# Altium PCB key.PcbDoc
Units mm, origin at the board's own origin, x right, y up, seen from the top; angles counter-clockwise.
Board outline 151 x 86.38 mm, 2 copper layers (Top Layer, Bottom Layer); 15 components, 19 nets, 58 pads, 0 vias.
Unrouted connection lines stored in the file: 24.
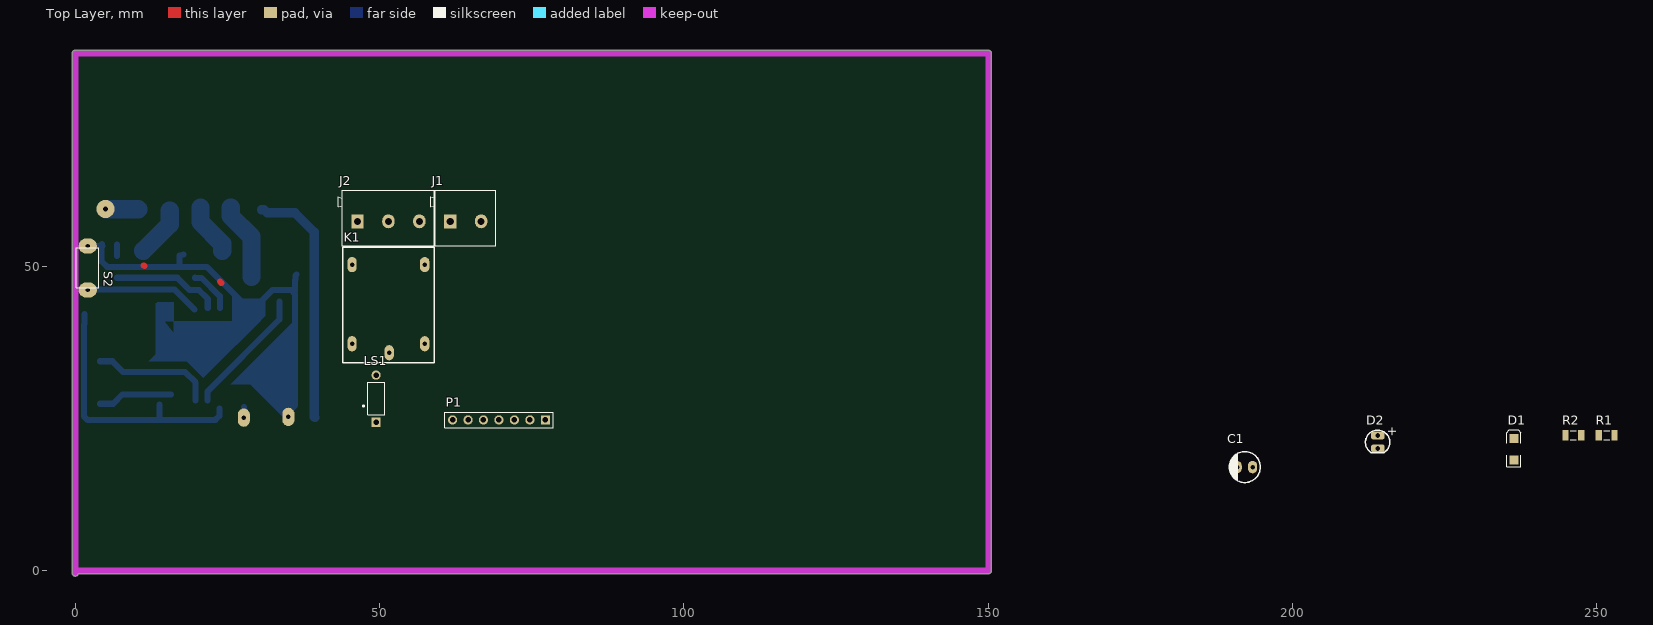
[diagram p0: Top Layer view]
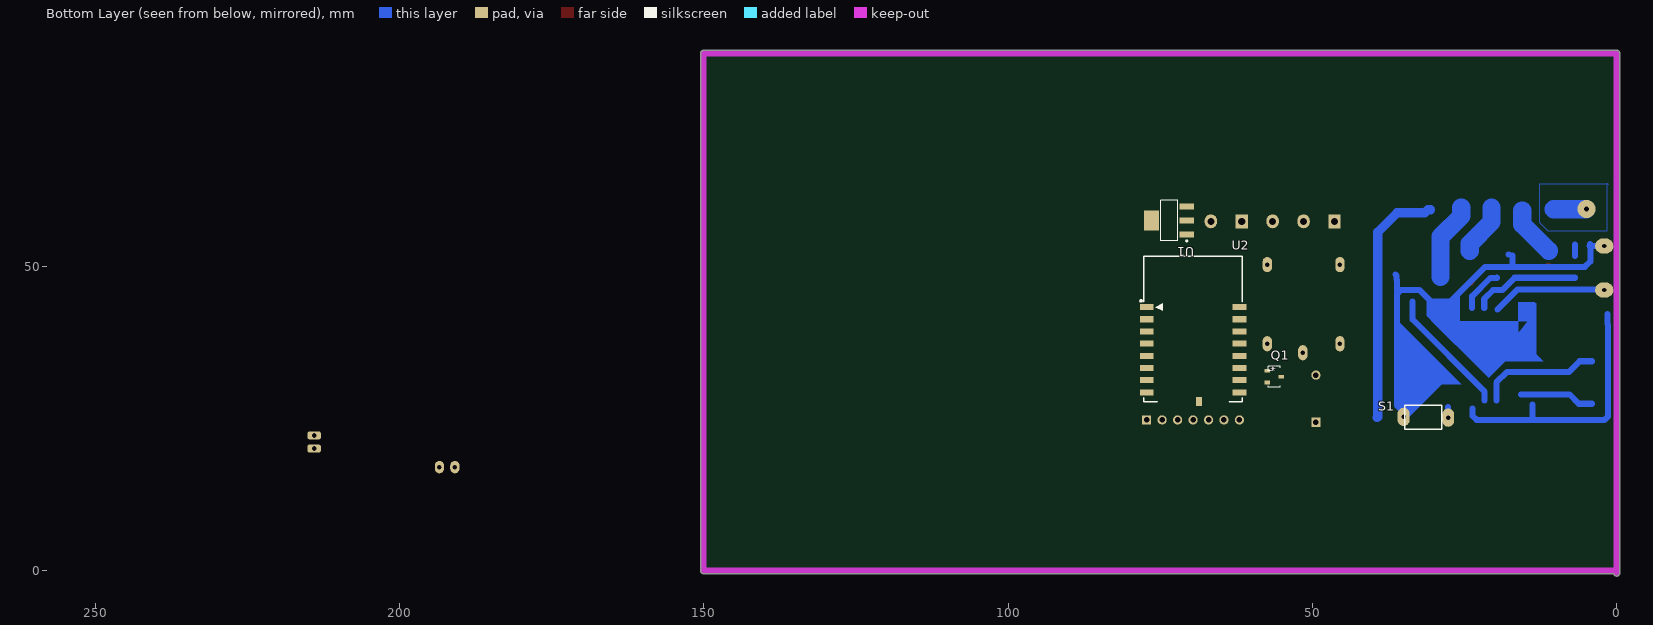
[diagram p1: Bottom Layer view, seen from below]

## Layer stack, top to bottom
Top Solder: solder mask 0.0102, Solder Resist, Dk 3.5
Top Layer: signal copper 0.0356
Dielectric 1: dielectric 0.32, FR-4, Dk 4.8
Bottom Layer: signal copper 0.0356
Bottom Solder: solder mask 0.0102, Solder Resist, Dk 3.5

## Board outline
-0.5,-0.381 -0.5,85 cw(c0,85) 0,85.5 150,85.5 cw(c150,85) 150.5,85 150.5,0 cw(c150,0) 150,-0.5 0.486,-0.5 cw(c0,-0.381)

## Design rules (kind name [scope] priority, off if disabled: settings)
Clearance Clearance_1 [InPolygon] p1: gap=0.8 ignorepadtopadclearanceinfootprint=FALSE
Clearance [All] p2: gap=0.254 ignorepadtopadclearanceinfootprint=FALSE except(0: Arc-Hole Track-Hole SMDPad-Hole THPad-Hole Via-Hole Fill-Hole Poly-Hole Region-Hole Text-Hole)
PolygonConnect [All] p1: connectstyle=Relief reliefconductorwidth=0.254 reliefentries=4 polygonreliefangle="90 Angle" airgapwidth=0.254
RoomDefinition tsc [InComponentClass('tsc')] p1: confinementstyle=ConfineIn formatcopy=TRUE lockcomponents=FALSE outline 144.907,-4.953 247.904,-4.953 247.904,23.114 144.907,23.114
RoutingLayers [All] p1: top layer_v5=FALSE bottom layer_v5=TRUE
RoutingVias [All] p1: holewidth=0.711 width=2.5 viastyle="Through Hole" minholewidth=0.711 minwidth=1.27 maxholewidth=0.711 maxwidth=2
SolderMaskExpansion [All] p1: expansion=0.102 istentingtop=FALSE
Width [All] p1: maxlimit=3 minlimit=0.5 preferedwidth=1
29 further rules are at their usual default settings.

## Components (designator, comment, footprint, x,y, rotation, side; value= is the part's Value field where it differs from the comment)
C1 "=Value" ELEC-CAP-RAD10-20 192.151,17.018 r0 top
D1 "D Tunnel1" 3.2X1.6X1.1 236.347,19.939 r90 top
D2 "LED 3mm" LED-3mm 213.868,21.209 r0 top
J1 "TBlock-2" "KF300-2 PIN" 61.595,57.404 r90 top
J2 "TBlock-3" "KF300-3 PIN" 46.355,57.404 r90 top
K1 "Relay-12vDC" Relays 43.942,34.163 r0 top
LS1 "Speaker" PIN2 49.403,27.051 r90 top
P1 "Header 7" HDR1X7 77.216,24.765 r180 top
Q1 "MMBT3904-TP" SOT23-3 56.268,33.147 r270 bottom
R1 "10K" "RES 1206 (3216X08L)" 251.587,22.225 r0 top
R2 "10K" "RES 1206 (3216X08L)" 246.126,22.225 r0 top
S1 "PB-2pin" PB-2pin 34.798,22.098 r180 bottom
S2 "PUSH BUTTON DOUBLE" "PUSH BUTTON" -0.254,49.784 r180 top
U1 "LM1117MP-3.3" MP04A_N 73.533,57.531 r0 bottom
U2 "ESP_12_E" ESP_12_E 77.591,43.306 r180 bottom

## Footprints (in the part's own frame and the unit in brackets; to place one, negate y for a bottom-side part, rotate by r counter-clockwise, add the part's x,y. Pads: shape width x height; smd on the part's side, far side on the other; paste and mask are expansions set on the pad)
3.2X1.6X1.1 [mm] "SMT LED; 2 Flat Leads"
  rect 1.5x1.5 smd: 1(-1.75,0) 2(1.75,0)
  silkscreen extent -2.9,-1.15 3.2,1.15
ELEC-CAP-RAD10-20 [mil]
  oval 60x80 hole 30: 1(-50,0) 2(50,0)
  silkscreen extent -100,-100 100,100, body extent -124,-124 124,124, height 404
ESP_12_E [mm] "ESP-12 Wi-Fi Module by AI-Thinker"
  rect 2.25x1 smd: 1(0.375,0) 2(0.375,-2) 3(0.375,-4) 4(0.375,-6) 5(0.375,-8) 6(0.375,-10) 7(0.375,-12) 8(0.375,-14) 15(15.625,-14) 16(15.625,-12) 17(15.625,-10) 18(15.625,-8) 19(15.625,-6) 20(15.625,-4) 21(15.625,-2) 22(15.625,0)
  rect 1x1.5 smd: 12(9,-15.5)
  silkscreen extent -0.7,-15.57 16.08,8.37, body extent 0,-15.49 16,8.51, height 2.75
HDR1X7 [mm] "Connector; Header; 7 Position"
  rect 1.5x1.5 hole 0.9: 1(0,0)
  round 1.5 hole 0.9: 2(2.54,0) 3(5.08,0) 4(7.62,0) 5(10.16,0) 6(12.7,0) 7(15.24,0)
  silkscreen extent -1.27,-1.27 16.51,1.27
"KF300-2 PIN" [mil]
  rect 90x80 hole 46: 1(0,0)
  oval 90x80 hole 46: 2(0,-200)
  silkscreen extent -160,-295 200,125, body extent -157,-295 200,127, height 493
"KF300-3 PIN" [mil]
  rect 90x80 hole 46: 1(0,0)
  oval 90x80 hole 46: 2(0,-200) 3(0,-400)
  silkscreen extent -160,-495 200,125, body extent -157,-495 200,128, height 503
LED-3mm [mm] "LED; 2 Leads"
  rrect50% 2.2x1.3 hole 0.8: 1(0.127,1.016) 2(0.127,-1.143)
  silkscreen extent -1.9,-1.81 2.09,1.89
MP04A_N [mm] "SOT223, 4-Leads, Body 6.5x3.5mm, Pitch 2.3mm, Lead Span 7mm, IPC Medium Density"
  rect 2.4x1 smd: 1(-2.9,2.3) 2(-2.9,0) 3(-2.9,-2.3)
  rect 2.4x3.3 smd: 4(2.9,0)
  silkscreen extent -3.02,-3.35 1.4,3.47, body extent -1.85,-3.35 1.85,3.35, height 1.8
PB-2pin [mm] "Switch"
  oval 2x3 hole 0.7: 1(-0.202,3.175) 2(7.112,3.048)
  silkscreen extent 0,1.14 6.1,5.08
PIN2 [mm] "Photosensitive Diode; 2 Leads"
  rect 1.5x1.5 hole 0.9: 1(-2.667,0)
  round 1.5 hole 0.9: 2(5.08,0)
  silkscreen extent -1.4,-1.4 3.94,2.17
"PUSH BUTTON" [mm]
  oval 3x2.5 hole 0.7: 2(-2.286,3.683) 4(-2.286,-3.556)
  silkscreen extent -4.06,-3.3 -0.38,3.3, body extent -3.93,-3.08 3.99,3.12, height 5.21
Relays [mil]
  oval 60x98.43 hole 30: 1(300,65) 2(60,635) 3(530,635) 4(60,123.11) 5(530,123.11)
  silkscreen extent 0,0 591,748
"RES 1206 (3216X08L)" [mm] "Chip Resistor, 2-Leads, Body 3.2x1.6mm, IPC High Density _ (0.125 W)"
  rect 1.05x1.7 smd: 1(-1.295,0) 2(1.301,0)
  silkscreen extent -0.5,-0.75 0.5,0.75, body extent -1.52,-0.76 1.53,0.76, height 0.6
SOT23-3 [mm]
  rect 0.6x0.9 smd: 1(0.32,-1.15) 2(2.22,-1.15) 3(1.27,1.15)
  silkscreen extent -0.48,-1 3.02,1

## Part data
C1: library part "Capacitor Electrolytic", "Electrolytic Capacitor"
D1: "Tunnel Diode - RLC Model", LatestRevisionDate=17-Jul-2002, LatestRevisionNote="Re-released for DXP Platform.", PackageDescription="SM LED; 2 Flat Leads", PackageReference=3.2X1.6X1.1, PackageVersion=Feb-2002, Published=8-Jun-2000, Publisher="Altium Limited"
D2: "Typical LED", Designer="Seyed Mohsen Ghasemian", PackageDescription="LED; 2 Leads", PackageReference=LED, Published=02/04/2012, Publisher=www.picpars.com
K1: library part Relay-05vDC, "Relay-05vDC-240AC 5A", ComponentLinkURL=www.picpars.com, Designer="Seyed Mohsen Ghasemain"
LS1: "Loudspeaker", LatestRevisionDate=17-Jul-2002, LatestRevisionNote="Re-released for DXP Platform.", PackageReference=PIN2, Published=24-Mar-1999, Publisher="Altium Limited"
P1: "Header, 7-Pin", LatestRevisionDate=17-Jul-2002, LatestRevisionNote="Re-released for DXP Platform.", Publisher="Altium Limited"
Q1: "Bipolar _BJT_ Transistor NPN 40V 200mA 300MHz 350mW Surface Mount SOT-23", Package="SOT-23 Micro Commercial", Availability=Unavailable, MF="Micro Commercial", MP=MMBT3904-TP, Price=None, SnapEDA_Link=https://www.snapeda.com/parts/MMBT3904-TP/Micro%20Commercial/view-part/805928/?ref=snap
R1 R2: library part Resistor, "Resistor", Power="1/4 W", Tolerance=5%
S1 S2: "Switch"
  S1: Designer="Seyed Mohsen Ghasemian", E-mail=picpars@gmail.com, Publisher=www.picpars.com, WEB=www.picpars.com
U1: "800mA Low-Dropout Linear Regulator", DigiKeyPartNumber=LM1117MP-3.3CT-ND, Manufacturer="National Semiconductor", PackageTopMarking=XYTT*N05A, PowerWise=N, Code_IPC=SOT223-4, Code_JEDEC=TO-261-AA, ComponentLink1Description="LM1117 Datasheet", ComponentLink1URL=http://www.national.com/ds/LM/LM1117.pdf, ComponentLink2Description="LM1117 Web Page", ComponentLink2URL=http://www.national.com/pf/LM/LM1117.html, ComponentLink3Description="MP04A Package Page", ComponentLink3URL=http://www.national.com/packaging/folders/mp04a.html, CompType="LDO IC", DatasheetVersion=Apr-2006, PackageDescription="Molded SOT-223, 6.50 x 3.56 x 1.6mm Body, 4 Lead, 2.3mm Pitch", PackageReference=MP04A, PackageVersion="revB, Apr-2003", PartNumber=LM1117MP-3.3, PinCount=4, Published=4-Dec-2008, Publisher="Altium Limited", RoHS=O
U2: "ESP-12 Wi-Fi Module by AI-Thinker", IC=ESP8266-EX, Vendor=Ai-thinker

## Free pads (board coordinates)
  round 3 hole 0.762: 2(4.953,59.436)

## Nets (pads, with @x,y where several pads share a name; then routed paths per layer and width w, separated by ;. In a path a pad name is that pad's centre, name@x,y a point inside that pad or via, vN(x,y) a via of type N, cw(c..) or ccw(c..) an arc to the next point about the centre after c; other vN are vias at no path point)
btn: S2.2 U2.18 | length 18.6
  Bottom Layer w1: S2.2@2.286,46.228 16.256,46.228 19.558,42.926
GND: C1.2 J1.2 Q1.2 S1.1 S2.4 U1.1 U2.15 U2.16 | length 87.7
  Bottom Layer w1: S2.4 4.318,53.34 ; 4.318,53.594 4.395,53.671 4.395,53.39 4.445,53.34 4.318,53.34 ; 14.732,37.465 14.732,37.109 15.088,37.465 26.162,37.465 30.099,41.402 30.099,43.992 29.895,44.196 ; 17.78,51.943 17.145,51.816 17.145,50.038 17.272,49.911 ; S1.1 35,26.044 36.068,27.112 36.068,45.515 35.941,45.642 35.482,46.101 32.385,46.101 30.48,44.196 29.895,44.196 ; 35.839,45.745 36.068,45.974 36.068,47.742 36.188,47.862 36.188,48.507 36.322,48.641 ; 4.318,53.34 4.318,50.8 5.207,49.911 17.272,49.911 ; 17.272,49.911 21.59,49.911 27.305,44.196 29.895,44.196
i1: P1.1
i2: P1.2
i3: P1.3
i4: P1.4
i5: P1.5
i6: P1.6
i7: P1.7
NetD1_1: D1.1 K1.4 Q1.3 R1.2
NetD2_2: D2.2 R1.1
NetJ2_1: J2.1 K1.3
NetJ2_2: J2.2 K1.1
NetJ2_3: J2.3 K1.2
NetQ1_1: Q1.1 R2.2
rst: S1.2 U2.1 | length 0.6
  Bottom Layer w1: S1.2@27.686,26.299 27.686,26.924
VCC: D1.2 D2.1 K1.5
vDD: J1.1 U1.3
vesp: C1.1 U1.2 U1.4 U2.3 U2.8 | length 42.8
  Bottom Layer w1: 1.48,42.164 1.48,40.511 1.397,40.428 1.397,25.351 1.983,24.765 22.987,24.765 23.686,25.464 23.686,26.67 ; 13.843,25.4 13.843,27.305
pads on no net: LS1.1 LS1.2 R2.1 U2.2 U2.4 U2.5 U2.6 U2.7 U2.12 U2.17 U2.19 U2.20 U2.21 U2.22
copper on no net: | length 157.1
  Top Layer w1: 11.239,50.165 11.367,50.038 ; 23.765,47.498 23.979,47.284
  Bottom Layer w1: 4.064,27.432 6.223,27.432 7.747,28.956 15.748,28.956 ; 4.064,34.417 6.096,34.417 7.874,32.639 18.034,32.639 19.748,30.925 19.748,27.93 ; 4.953,59.436 5.016,59.372 ; 6.858,48.133 16.764,48.133 18.796,46.101 20.32,46.101 21.748,44.673 21.748,43.18 ; 6.858,51.689 6.858,53.594 ; 19.685,48.133 19.71,48.108 20.726,48.108 23.748,45.086 23.748,43.18 ; 21.686,27.93 21.686,29.433 33.528,41.275 33.528,44.196
  Bottom Layer w1.5: 30.607,59.309 31.013,59.309 31.521,58.801 36.068,58.801 39.243,55.626 39.243,25.273 39.37,25.146
  Bottom Layer w3: 5.016,59.372 10.351,59.372 ; 11.112,52.578 11.176,52.578 15.494,56.896 15.494,59.19 ; 20.574,59.69 20.574,57.277 24.13,53.721 24.13,52.578 ; 25.527,59.69 25.527,58.293 28.956,54.864 28.956,48.26

## Polygon pours and split planes (outlines as drawn)
no net on Bottom Layer "NONET_L02_P003" (solid, shelved, pour order 3): 1.397,63.5 12.7,63.5 12.7,57.277 11.303,55.88 1.524,55.88 1.524,63.627
no net on Bottom Layer "NONET_L02_P001" (solid, pour order 1): 6.985,67.691

## Keep-outs
Keep-Out Layer:
  lines w1: 0,-0.381 0,85 150,85 150,0 0,0

## Other copper
Bottom Layer:
  pour cut-out: 3.556,61.341
  region net GND: 35.886,40.966 25.527,30.607 28.702,30.607 34.036,25.273 35.629,25.273
  region net GND: 14.605,41.021 25.781,41.021 25.781,45.339 25.908,45.466 27.178,44.196 31.242,44.196 31.242,41.91 26.543,37.211 21.018,31.686 18.288,34.417 12.065,34.417 13.208,35.56 13.208,43.942 13.335,43.942 13.462,44.069 16.129,44.069 16.129,38.989
  region: 18.669,43.688
  region: 19.685,43.688
  region: 29.591,43.434

## Text inside footprints (layer, text, board x,y; h text height)
D2: Top Overlay "+" at 217.043,21.971 h1.52 r90
Q1: Bottom Overlay "*" at 57.268,33.627 h1.27 r90
U2: Mechanical 13 "CUTOUT POLYGON" at 77.464,50.672 h0.25; Mechanical 13 "ANTENNA AREA" at 77.464,51.18 h0.25